# EAGLE board 200mm-LVDT (EAGLE 5.12)
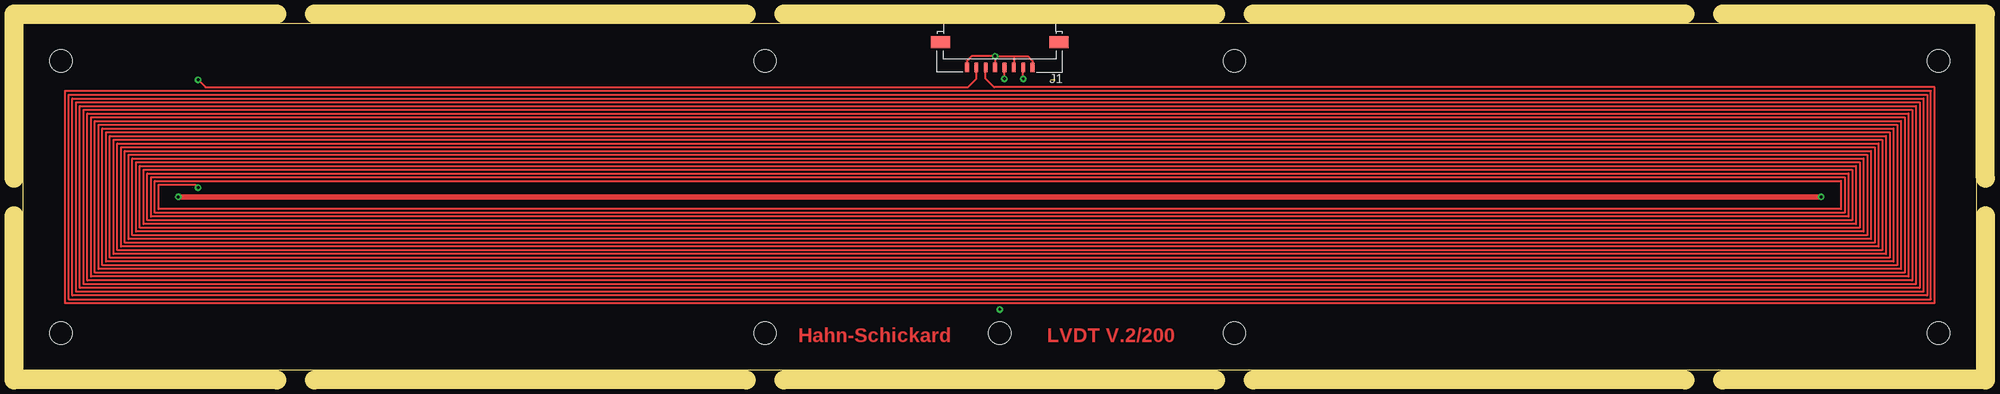
[diagram p0: board, top side]
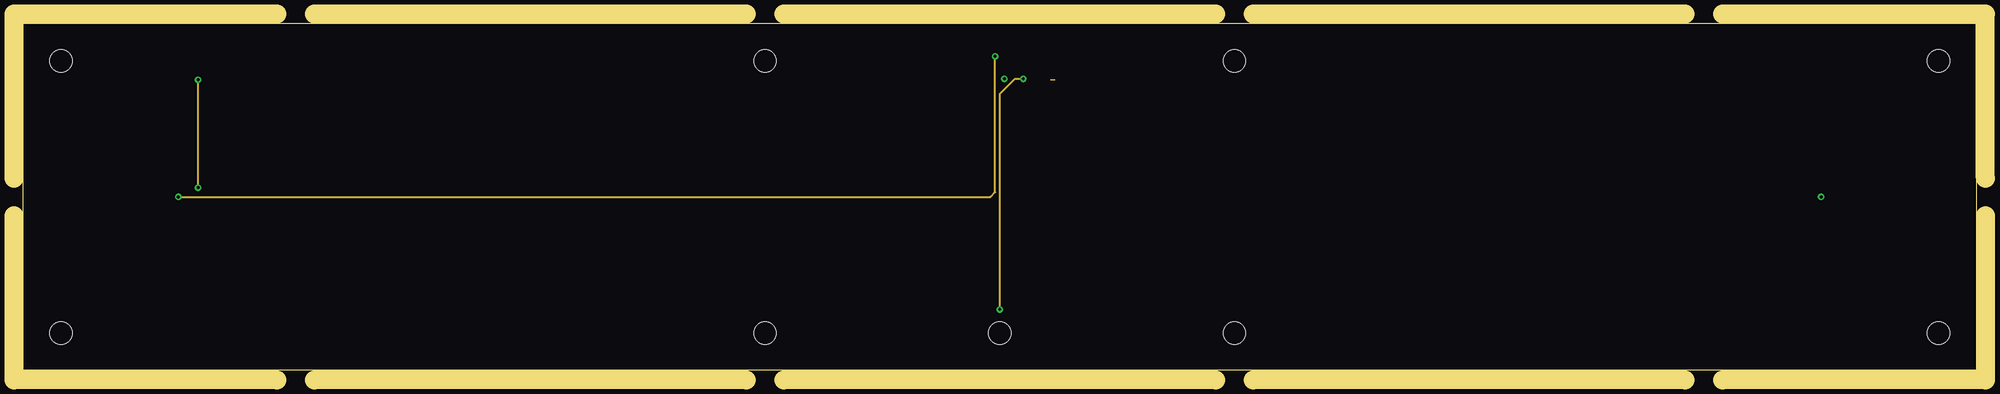
[diagram p1: board, inner layer Route2]
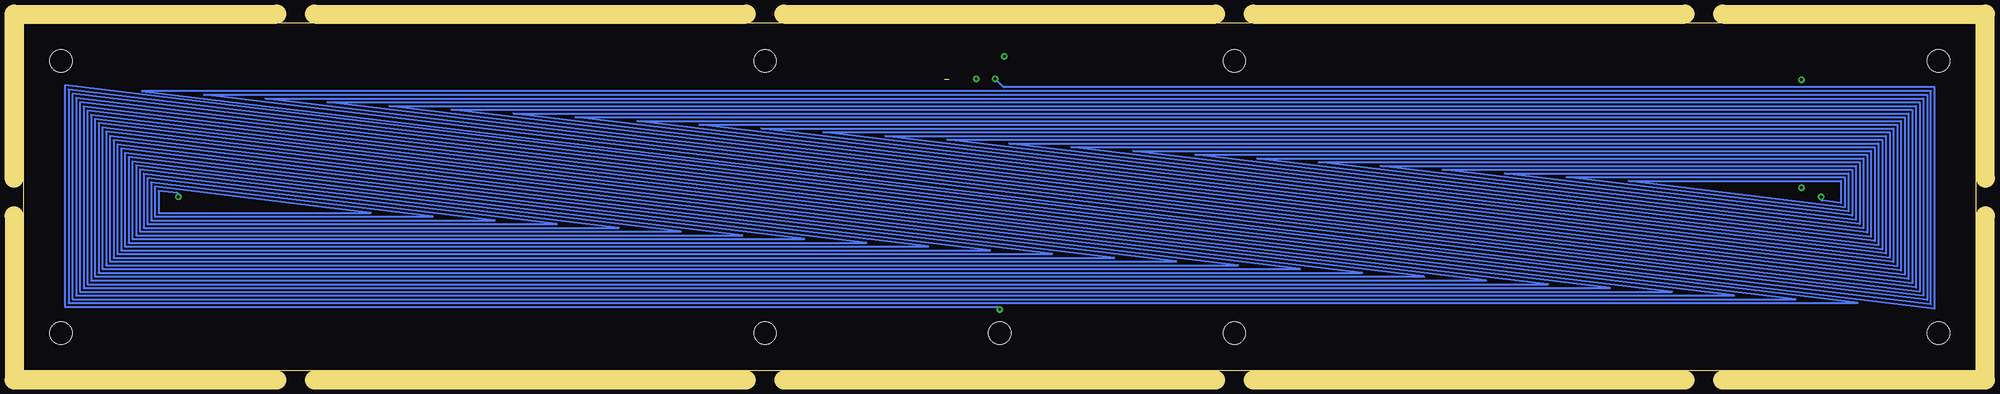
[diagram p2: board, bottom side, seen from below]

Size 208 x 37 mm. Coordinates in mm from the lower left corner, seen from the top.
Outline: 109.4,31 109.9,31
Outline: 0,0 0,37 208,37 208,0 0,0
Copper layers (1*2+15*16): Top 0.035mm / dielectric 0.4mm / Route2 0.035mm / dielectric 0.6mm / Route15 0.035mm / dielectric 0.4mm / Bottom 0.035mm
Design rules "default *": minimum track width 0.2mm, minimum drill 0.3mm, track to track 0.2mm, track to pad 0.2mm, pad to pad 0.2mm, via to via 0.2mm, smd to smd 0.2mm, copper to edge 0.3mm, drill to drill 8mil, minimum pad ring 10mil, minimum via ring 0.2mm, stop-mask expansion 4mil, vias tented up to drill 0mil, thermal gap 10mil
Holes 2.4 mm at 204,4 204,33 4,33 4,4 104,4 129,4 129,33 79,33 79,4
Milling: 14 lines

## Footprints (pad centres in the part's own frame; a part is rotated, then mirrored left to right if it is on the bottom)
200529-0080 = smd 0.4 x 1: 1 -3.5,2.7; 2 -2.5,2.7; 3 -1.5,2.7; 4 -0.5,2.7; 5 0.5,2.7; 6 1.5,2.7; 7 2.5,2.7; 8 3.5,2.7 | smd 2 x 1.3: G1 -6.3,0; G2 6.3,0

## Placement (x,y rotation side)
J1  ZIF_200529-0080  [200529-0080]  104,35 180 top

## Library data of the parts
J1 = CON_FFC_FPC

## Nets
S$1: J1.6 J1.7
S$4: J1.1 J1.2 J1.3 J1.4 J1.5 J1.8

## Tracks (layer width: path | path; a pad name or v marks a point on that pad's centre or on a via)
S$1  (via drill 0.3, 0.3 pad 0.3)
  Top 0.2: v18.6,19.5 18.3,19.8 14.4,19.8 14.4,17.2 193.6,17.2 193.6,20.2 14,20.2 14,16.8 194,16.8 194,20.6 13.6,20.6 13.6,16.4 194.4,16.4 194.4,21 13.2,21 13.2,16 194.8,16 194.8,21.4 12.8,21.4 12.8,15.6 195.2,15.6 195.2,21.8 12.4,21.8 12.4,15.2 195.6,15.2 195.6,22.2 12,22.2 12,14.8 196,14.8 196,22.6 11.6,22.6 11.6,14.4 196.4,14.4 196.4,23 11.2,23 11.2,14 196.8,14 196.8,23.4 10.8,23.4 10.8,13.6 197.2,13.6 197.2,23.8 10.4,23.8 10.4,13.2 197.6,13.2 197.6,24.2 10,24.2 10,12.8 198,12.8 198,24.6 9.6,24.6 9.6,12.4 198.4,12.4 198.4,25 9.2,25 9.2,12 198.8,12 198.8,25.4 8.8,25.4 8.8,11.6 199.2,11.6 199.2,25.8 8.4,25.8 8.4,11.2 199.6,11.2 199.6,26.2 8,26.2 8,10.8 200,10.8 200,26.6 7.6,26.6 7.6,10.4 200.4,10.4 200.4,27 7.2,27 7.2,10 200.8,10 200.8,27.4 6.8,27.4 6.8,9.6 201.2,9.6 201.2,27.8 6.4,27.8 6.4,9.2 201.6,9.2 201.6,28.2 6,28.2 6,8.8 202,8.8 202,28.6 5.6,28.6 5.6,8.4 202.4,8.4 202.4,29 5.2,29 5.2,8 202.8,8 202.8,29.4 4.8,29.4 4.8,7.6 203.2,7.6 203.2,29.8 4.4,29.8 4.4,7.2 203.6,7.2 203.6,30.2 103.4,30.2 102.5,31.1 J1.6 | v18.6,31 19.4,30.2 100.6,30.2 101.5,31.1 J1.7
  Route2 0.2: v18.6,19.5 v18.6,31
S$4  (via drill 0.3)
  Top 0.2: v104.5,31.1 J1.4 | v106.5,31.1 J1.2 | v103.5,33.5 105.5,33.5 | 105.5,33.5 107,33.5 107.5,33 J1.1 | v103.5,33.5 101,33.5 100.5,33 J1.8 | 105.5,33.5 J1.3 | v103.5,33.5 J1.5
  Top 0.6: v16.5,18.5 v191.5,18.5
  Route2 0.2: v106.5,31.1 105.6,31.1 104,29.5 v104,6.5 | v103.5,33.5 103.5,19 103,18.5 v16.5,18.5
  Bottom 0.2: v191.5,18.5 191.55,18.9 193.6,19.15 193.6,16.8 171,16.8 194,19.6 194,16.4 164.4,16.4 194.4,20.05 194.4,16 157.8,16 194.8,20.5 194.8,15.6 151.2,15.6 195.2,20.95 195.2,15.2 144.6,15.2 195.6,21.4 195.6,14.8 138,14.8 196,21.85 196,14.4 131.4,14.4 196.4,22.3 196.4,14 124.8,14 196.8,22.75 196.8,13.6 118.2,13.6 197.2,23.2 197.2,13.2 111.6,13.2 197.6,23.65 197.6,12.8 105,12.8 198,24.1 198,12.4 98.4,12.4 198.4,24.55 198.4,12 91.8,12 198.8,25 198.8,11.6 85.2,11.6 199.2,25.45 199.2,11.2 78.6,11.2 199.6,25.9 199.6,10.8 72,10.8 200,26.35 200,10.4 65.4,10.4 200.4,26.8 200.4,10 58.8,10 200.8,27.25 200.8,9.6 52.2,9.6 201.2,27.7 201.2,9.2 45.6,9.2 201.6,28.15 201.6,8.8 39,8.8 202,28.6 202,8.4 32.4,8.4 202.4,29.05 202.4,8 25.8,8 202.8,29.5 202.8,7.6 19.2,7.6 203.2,29.95 203.2,7.2 12.6,7.2 203.6,30.4 203.6,6.8 104.3,6.8 v104,6.5 | v16.5,18.5 16.45,18.1 14.4,17.85 14.4,20.2 37,20.2 14,17.4 14,20.6 43.6,20.6 13.6,16.95 13.6,21 50.2,21 13.2,16.5 13.2,21.4 56.8,21.4 12.8,16.05 12.8,21.8 63.4,21.8 12.4,15.6 12.4,22.2 70,22.2 12,15.15 12,22.6 76.6,22.6 11.6,14.7 11.6,23 83.2,23 11.2,14.25 11.2,23.4 89.8,23.4 10.8,13.8 10.8,23.8 96.4,23.8 10.4,13.35 10.4,24.2 103,24.2 10,12.9 10,24.6 109.6,24.6 9.6,12.45 9.6,25 116.2,25 9.2,12 9.2,25.4 122.8,25.4 8.8,11.55 8.8,25.8 129.4,25.8 8.4,11.1 8.4,26.2 136,26.2 8,10.65 8,26.6 142.6,26.6 7.6,10.2 7.6,27 149.2,27 7.2,9.75 7.2,27.4 155.8,27.4 6.8,9.3 6.8,27.8 162.4,27.8 6.4,8.85 6.4,28.2 169,28.2 6,8.4 6,28.6 175.6,28.6 5.6,7.95 5.6,29 182.2,29 5.2,7.5 5.2,29.4 188.8,29.4 4.8,7.05 4.8,29.8 195.4,29.8 4.4,6.6 4.4,30.2 103.6,30.2 v104.5,31.1

## Text on the board
Top: Hahn-Schickard | LVDT V.2/200